# Altium PCB SbusConverter_v2.PcbDoc
Units mm, origin at the board's own origin, x right, y up, seen from the top; angles counter-clockwise.
Board outline 26 x 15 mm, 2 copper layers (Top Layer, Bottom Layer), stack 0.532 mm thick; 5 components, 5 nets, 16 pads, 0 vias.
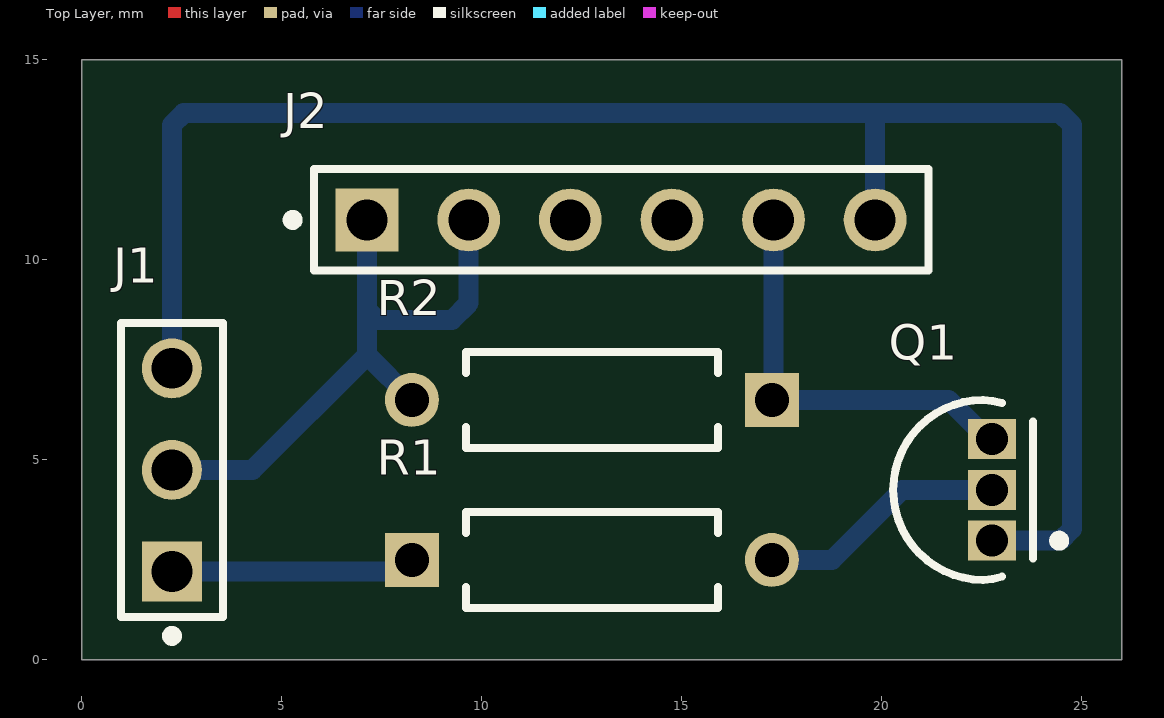
[diagram p0: Top Layer view]
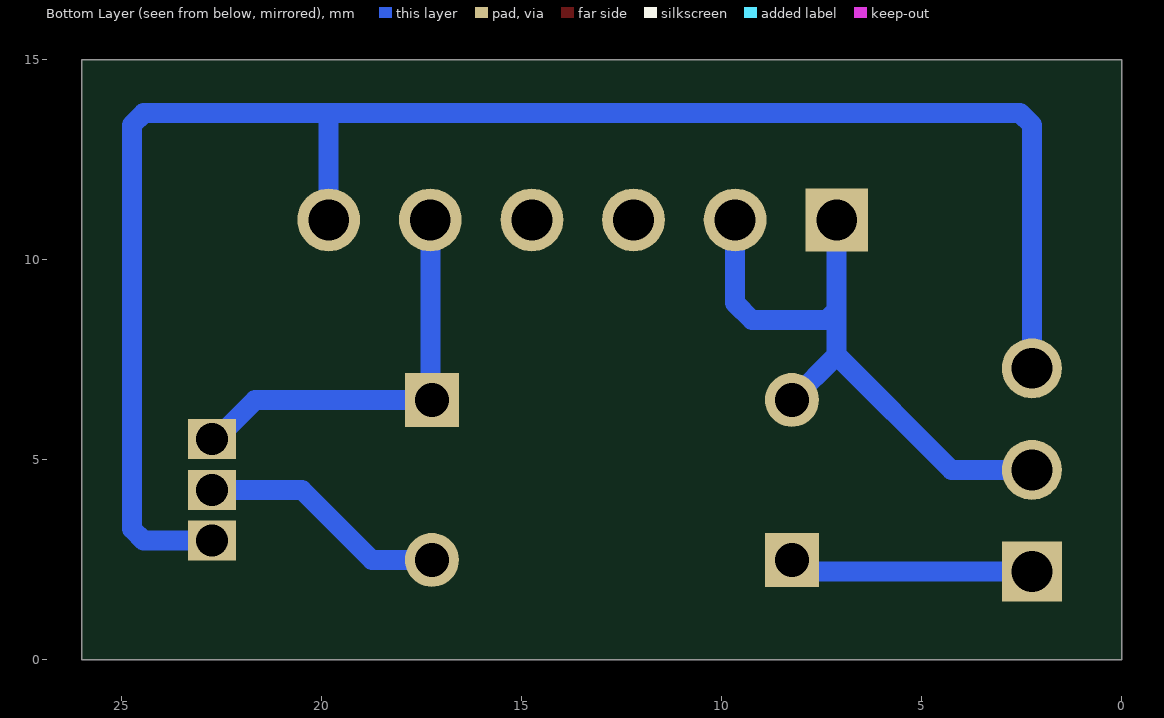
[diagram p1: Bottom Layer view, seen from below]

## Layer stack, top to bottom
Top Solder: solder mask 0.0254, SM-001, Dk 4
Top Layer: signal copper 0.035
Dielectric 2: prepreg 0.0711, PP-006, Dk 4.1
Dielectric 1: dielectric 0.32, FR-4, Dk 4.8
Dielectric 3: prepreg 0.0711, PP-006, Dk 4.1
Bottom Layer: signal copper 0.035
Bottom Solder: solder mask 0.0254, SM-001, Dk 4

## Board outline
0,0 26,0 26,15 0,15

## Design rules (kind name [scope] priority, off if disabled: settings)
Clearance [All] p1: gap=0.25 ignorepadtopadclearanceinfootprint=FALSE except(1.2: SMDPad-Fill SMDPad-Poly SMDPad-Region THPad-Fill THPad-Poly THPad-Region)
MinimumSolderMaskSliver [All] p1: minsoldermaskwidth=0.22
PlaneConnect [All] p1: pad.planeconnectstyle=Relief pad.reliefexpansion=0.254 pad.reliefentries=4 pad.reliefconductorwidth=0.254 pad.reliefairgap=0.254 via.planeconnectstyle=Direct via.reliefexpansion=0.508 via.reliefentries=4 via.reliefconductorwidth=0.254 via.reliefairgap=0.254
PolygonConnect [All] p1: connectstyle=Relief reliefconductorwidth=0.254 reliefentries=4 polygonreliefangle="90 Angle" airgapwidth=0.254
RoutingVias [All] p1: holewidth=0.6 width=1 viastyle="Through Hole" minholewidth=0.6 minwidth=1 maxholewidth=0.6 maxwidth=1
SilkToSolderMaskClearance [IsText] p1: minsilkscreentomaskgap=0.254 clearancetoexposedcopper=TRUE
SolderMaskExpansion [All] p1: expansion=0.22 istentingtop=FALSE
Width Width_Power [(InNet('VCC_USB') OR InNet('GND'))] p1: maxlimit=0.5 minlimit=0.25 preferedwidth=0.5
Width [All] p2: maxlimit=1 minlimit=0.2 preferedwidth=0.254
27 further rules are at their usual default settings.

## Components (designator, comment, footprint, x,y, rotation, side; value= is the part's Value field where it differs from the comment)
J1 "3-pin connector" FP-87224-3-MFG 2.25,4.75 r90 top
J2 "6 pin connector" FP-HTSW-106-07-G-S-MFG 13.48,11 r0 top
Q1 "S9013" JSCJ-TO-92-3_V 22.75,4.25 r90 top
R1 "MFR-25FBF52-1K" RESA60-630X240 12.75,2.5 r0 top value=1k
R2 "MFR-25FBF52-10K" RESA60-630X240 12.75,6.5 r180 top value=10k

## Footprints (in the part's own frame and the unit in brackets; to place one, negate y for a bottom-side part, rotate by r counter-clockwise, add the part's x,y. Pads: shape width x height; smd on the part's side, far side on the other; paste and mask are expansions set on the pad)
FP-87224-3-MFG [mm]
  rect 1.5x1.5 hole 1.02 paste-1000 mask+0: 1(-2.54,0)
  round 1.5 hole 1.02 paste-1000 mask+0: 2(0,0) 3(2.54,0)
  silkscreen extent -4.27,-1.27 3.67,1.27, body extent -3.77,-1.37 3.77,1.37, height 0.25
FP-HTSW-106-07-G-S-MFG [mm]
  rect 1.57x1.57 hole 1.02 paste-1000 mask+0: 1(-6.35,0)
  round 1.57 hole 1.02 paste-1000 mask+0: 2(-3.81,0) 3(-1.27,0) 4(1.27,0) 5(3.81,0) 6(6.35,0)
  silkscreen extent -8.33,-1.27 7.68,1.27, body extent -7.78,-1.37 7.78,1.37, height 0.25
JSCJ-TO-92-3_V [mm] "TO-92, 3-leads, Height 4.7mm, Pitch 1.27mm"
  rect 1x1.2 hole 0.8: 1(-1.27,0) 2(0,0) 3(1.27,0)
  silkscreen extent -2.25,-1.81 2.25,2.47, body extent -2.25,-1.03 2.25,2.47, height 4.7
RESA60-630X240 [mm] "Axial Resistor, 2-Leads, Dia 2.4mm, Body Length 6.3mm"
  rect 1.35x1.35 hole 0.85: 1(-4.5,0)
  round 1.35 hole 0.85: 2(4.5,0)
  silkscreen extent -3.15,-1.2 3.15,1.2, body extent -4.77,-1.19 4.77,1.2, height 2.4

## Part data
J1: library part CMP-002-00073-1, "Board Connector, 3 Contact(s), 1 Row(s), Male, Straight, 0.1 inch Pitch, Solder Terminal, Black Insulator, Receptacle", Dielectric Withstanding Voltage (AC)=750V, Flammability Rating="UL94 V-0", Insulation Color=Black, Insulation Resistance=5GR, Max Operating Temperature=105°C, Min Operating Temperature=-65°C, Rated Current (Signal)=3A, Body Breadth=0.1inch, Body Depth=0.09inch, Body Length=0.284inch, Body/Shell Style=RECEPTACLE, Connector Type="BOARD CONNECTOR", Contact Finish - Mating="GOLD (15)", Contact Finish - Termination="Gold (Au) - with Nickel (Ni) barrier", Contact Gender=Male, Contact Material="Copper Alloy", Contact Pattern=RECTANGULAR, Contact Style="SQ PIN-SKT", DIN Conformance=No, Filter Feature=No, IEC Conformance=No, Insulation Material=Thermoplastic, JESD-609 Code=e4, Mating Contact Pitch=0.1inch, Mating Information="MULTIPLE MATING PARTS AVAILABLE", MIL Conformance=No, Mixed Contacts=No, Mounting Style=STRAIGHT, Mounting Technology=Board, Number Of Connectors=1, Number of Contacts=3, Number Of PCB Rows=3, Number of Rows Loaded=1, Option="General Purpose", PCB Contact Pattern=RECTANGULAR, Plating Thickness=15uin, Reach SVHC Compliant=No, Reference Standard=UL, Reliability=COMMERCIAL, RoHS Compliant=Yes, Terminal Length=0.125inch, Terminal Pitch=2.54mm, Termination=Solder
J2: library part CMP-002-00076-1, "Board Connector, 6 Contact(s), 1 Row(s), Male, Straight, 0.1 inch Pitch, Solder Terminal, Natural Insulator", Insulation Color=Natural, Max Operating Temperature=125°C, Min Operating Temperature=-55°C, Additional Feature=E.L.P., Body Breadth=0.198inch, Body Depth=0.1inch, Body Length=1.2inch, Body/Shell Style=RECEPTACLE, Connector Type="BOARD CONNECTOR", Contact Finish - Mating="GOLD (10) OVER NICKEL (50)", Contact Finish - Termination="Gold (Au) - with Nickel (Ni) barrier", Contact Gender=Male, Contact Material=Bronze, Contact Pattern=RECTANGULAR, Contact Style="SQ PIN-SKT", DIN Conformance=No, Filter Feature=No, IEC Conformance=No, Insulation Material=Polymer, JESD-609 Code=e4, Mating Contact Pitch=0.1inch, Mating Information="MULTIPLE MATING PARTS AVAILABLE", MIL Conformance=No, Mixed Contacts=No, Mounting Style=STRAIGHT, Mounting Technology=Board, Number Of Connectors=1, Number of Contacts=6, Number Of PCB Rows=1, Number of Rows Loaded=1, Option="General Purpose", PCB Contact Pattern=RECTANGULAR, Plating Thickness=10uin, Reach SVHC Compliant=Yes, Reference Standard=UL, Reliability=COMMERCIAL, RoHS Compliant=Yes, Terminal Pitch=2.54mm, Termination=Solder
Q1: library part CMP-013-00000-3, "Transistor, NPN, 0.1 uA, 150 MHz, 3-Pin TO-92", Case/Package=TO-92-3, Manufacturer="Jiangsu Changjiang Electronics Technology", Package Description="3-Pin Through Hole Device, Height 4.7 mm, Pitch 2.3 mm", Datasheet URL=http://www.cj-elec.com/txUpfile/20121910315050632.pdf, Datasheet Version="Rev. B, 11/2011", Mounting Technology=TH, Package Reference=TO-92-3, RoHS Compliant=False
R1: library part CMP-009-00048-4, "Axial Resistor, 1 KOhm, +/- 1%, 250 mW, -55 to 155 degC, 2-Pin THD, RoHS, Bulk", Case/Package=Axial, Manufacturer=Yageo, Max Operating Temperature=155°C, Min Operating Temperature=-55°C, Package Description="2-Pin Axial Lead, Dia 2.4 mm, Body Length 6.3 mm", Package Quantity=200, Package Reference=MFR-25, Power=250mW, Tolerance=1%, Voltage Rating=250V, Composition=CarbonFilm, Datasheet URL=http://www.yageo.com/documents/recent/Yageo%20LR_MFR_2013.pdf, Datasheet Version=Apr-13, Manufacturer URL=http://www.yageo.com/, Mounting Technology=TH, Packaging=Bulk, RoHS Compliant=True
R2: library part CMP-009-00047-4, "Axial Resistor, 10 KOhm, +/- 1%, 0.25 W, -55 to 155 degC, 2-Pin THD, RoHS, Bulk", Case/Package=Axial, Manufacturer=Yageo, Max Operating Temperature=155°C, Min Operating Temperature=-55°C, Package Description="2-Pin Axial Lead, Dia 2.4 mm, Body Length 6.3 mm", Package Quantity=200, Package Reference=MFR-25, Power=250mW, Tolerance=1%, Voltage Rating=250V, Datasheet URL=http://www.yageo.com/documents/recent/Yageo%20LR_MFR_2013.pdf, Datasheet Version=Apr-13, Manufacturer URL=http://www.yageo.com/, Mounting Technology=TH, Packaging=Bulk, RoHS Compliant=True

## Nets (pads, with @x,y where several pads share a name; then routed paths per layer and width w, separated by ;. In a path a pad name is that pad's centre, name@x,y a point inside that pad or via, vN(x,y) a via of type N, cw(c..) or ccw(c..) an arc to the next point about the centre after c; other vN are vias at no path point)
GND: J1.3 J2.6 Q1.1 | length 43.7
  Bottom Layer w0.5: J1.3 2.25,13.377 2.543,13.67 19.83,13.67 ; J2.6 19.83,13.67 ; Q1.1 24.457,2.98 24.75,3.273 24.75,13.377 24.457,13.67 19.83,13.67
NetQ1_2: Q1.2 R1.2 | length 6.2
  Bottom Layer w0.5: R1.2 18.75,2.5 20.5,4.25 Q1.2
RC_SBus: J1.1 R1.1 | length 6.1
  Bottom Layer w0.5: J1.1 7.96,2.21 R1.1
UBS2TTYL: J2.5 Q1.3 R2.1 | length 10.3
  Bottom Layer w0.5: R2.1@17.125,6.625 17.29,6.79 J2.5 ; R2.1 21.67,6.5 22.65,5.52 Q1.3
VCC_USB: J1.2 J2.1 J2.2 R2.2 | length 15.9
  Bottom Layer w0.5: J1.2 4.26,4.75 7.13,7.62 ; J2.1 7.13,8.75 ; R2.2 7.13,7.62 ; J2.2 9.67,8.92 9.25,8.5 7.38,8.5 7.13,8.75 ; 7.13,7.62 7.13,8.75
pads on no net: J2.3 J2.4